# Altium PCB B2.0-主板-2.0-stm32c8t6最小系统板-24.10.16.PcbDoc
Units mm, origin at the board's own origin, x right, y up, seen from the top; angles counter-clockwise.
Board outline 152.4 x 101.6 mm, 2 copper layers (Top Layer, Bottom Layer); 14 components, 38 nets, 118 pads, 2 vias.
Unrouted connection lines stored in the file: 5.
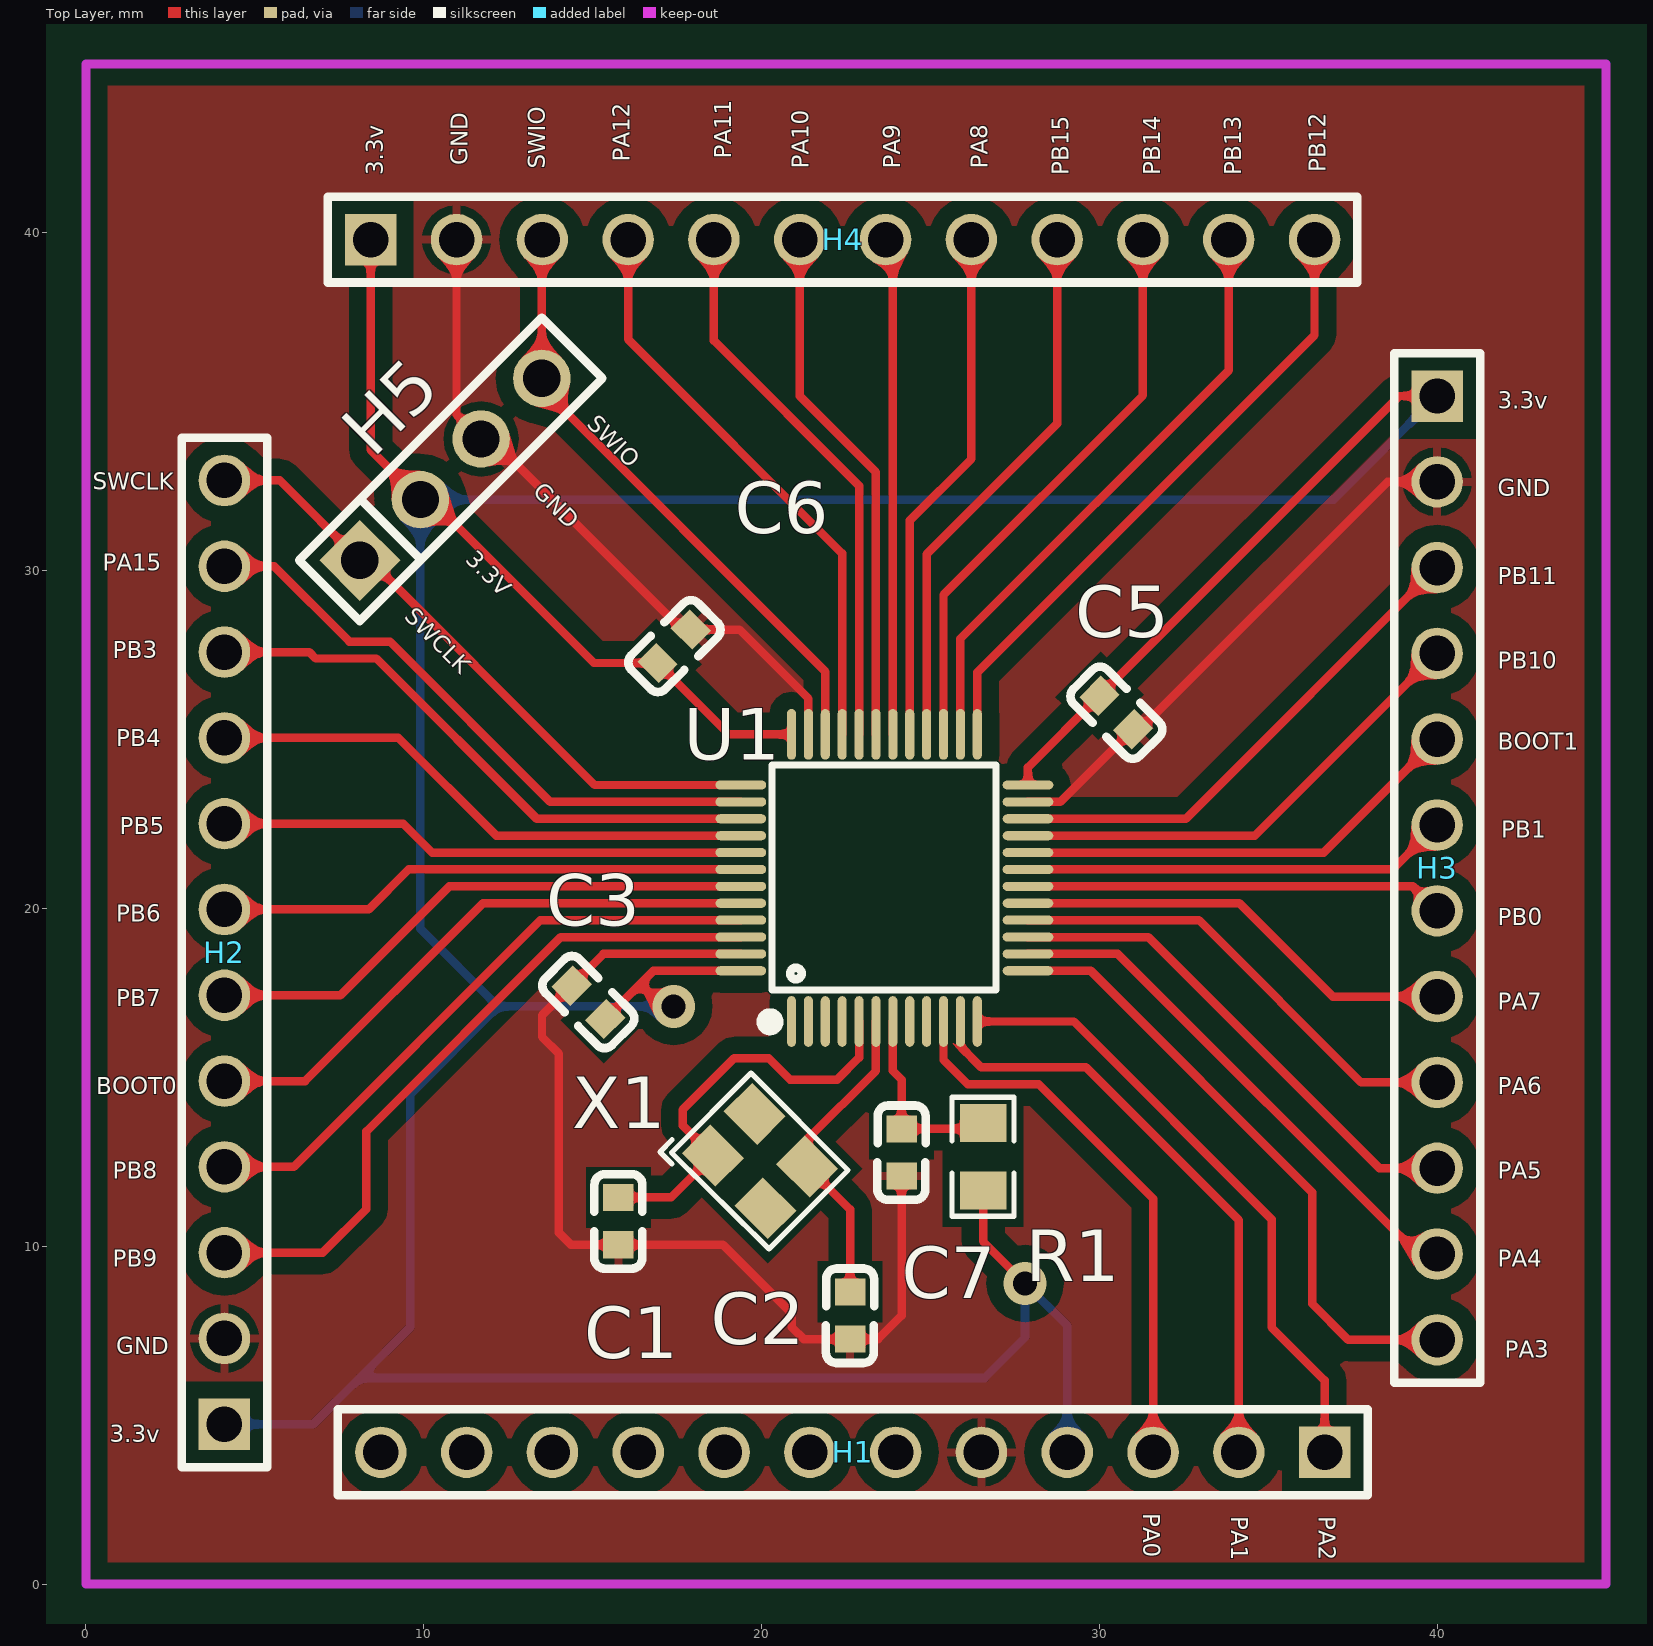
[diagram p0: Top Layer view]
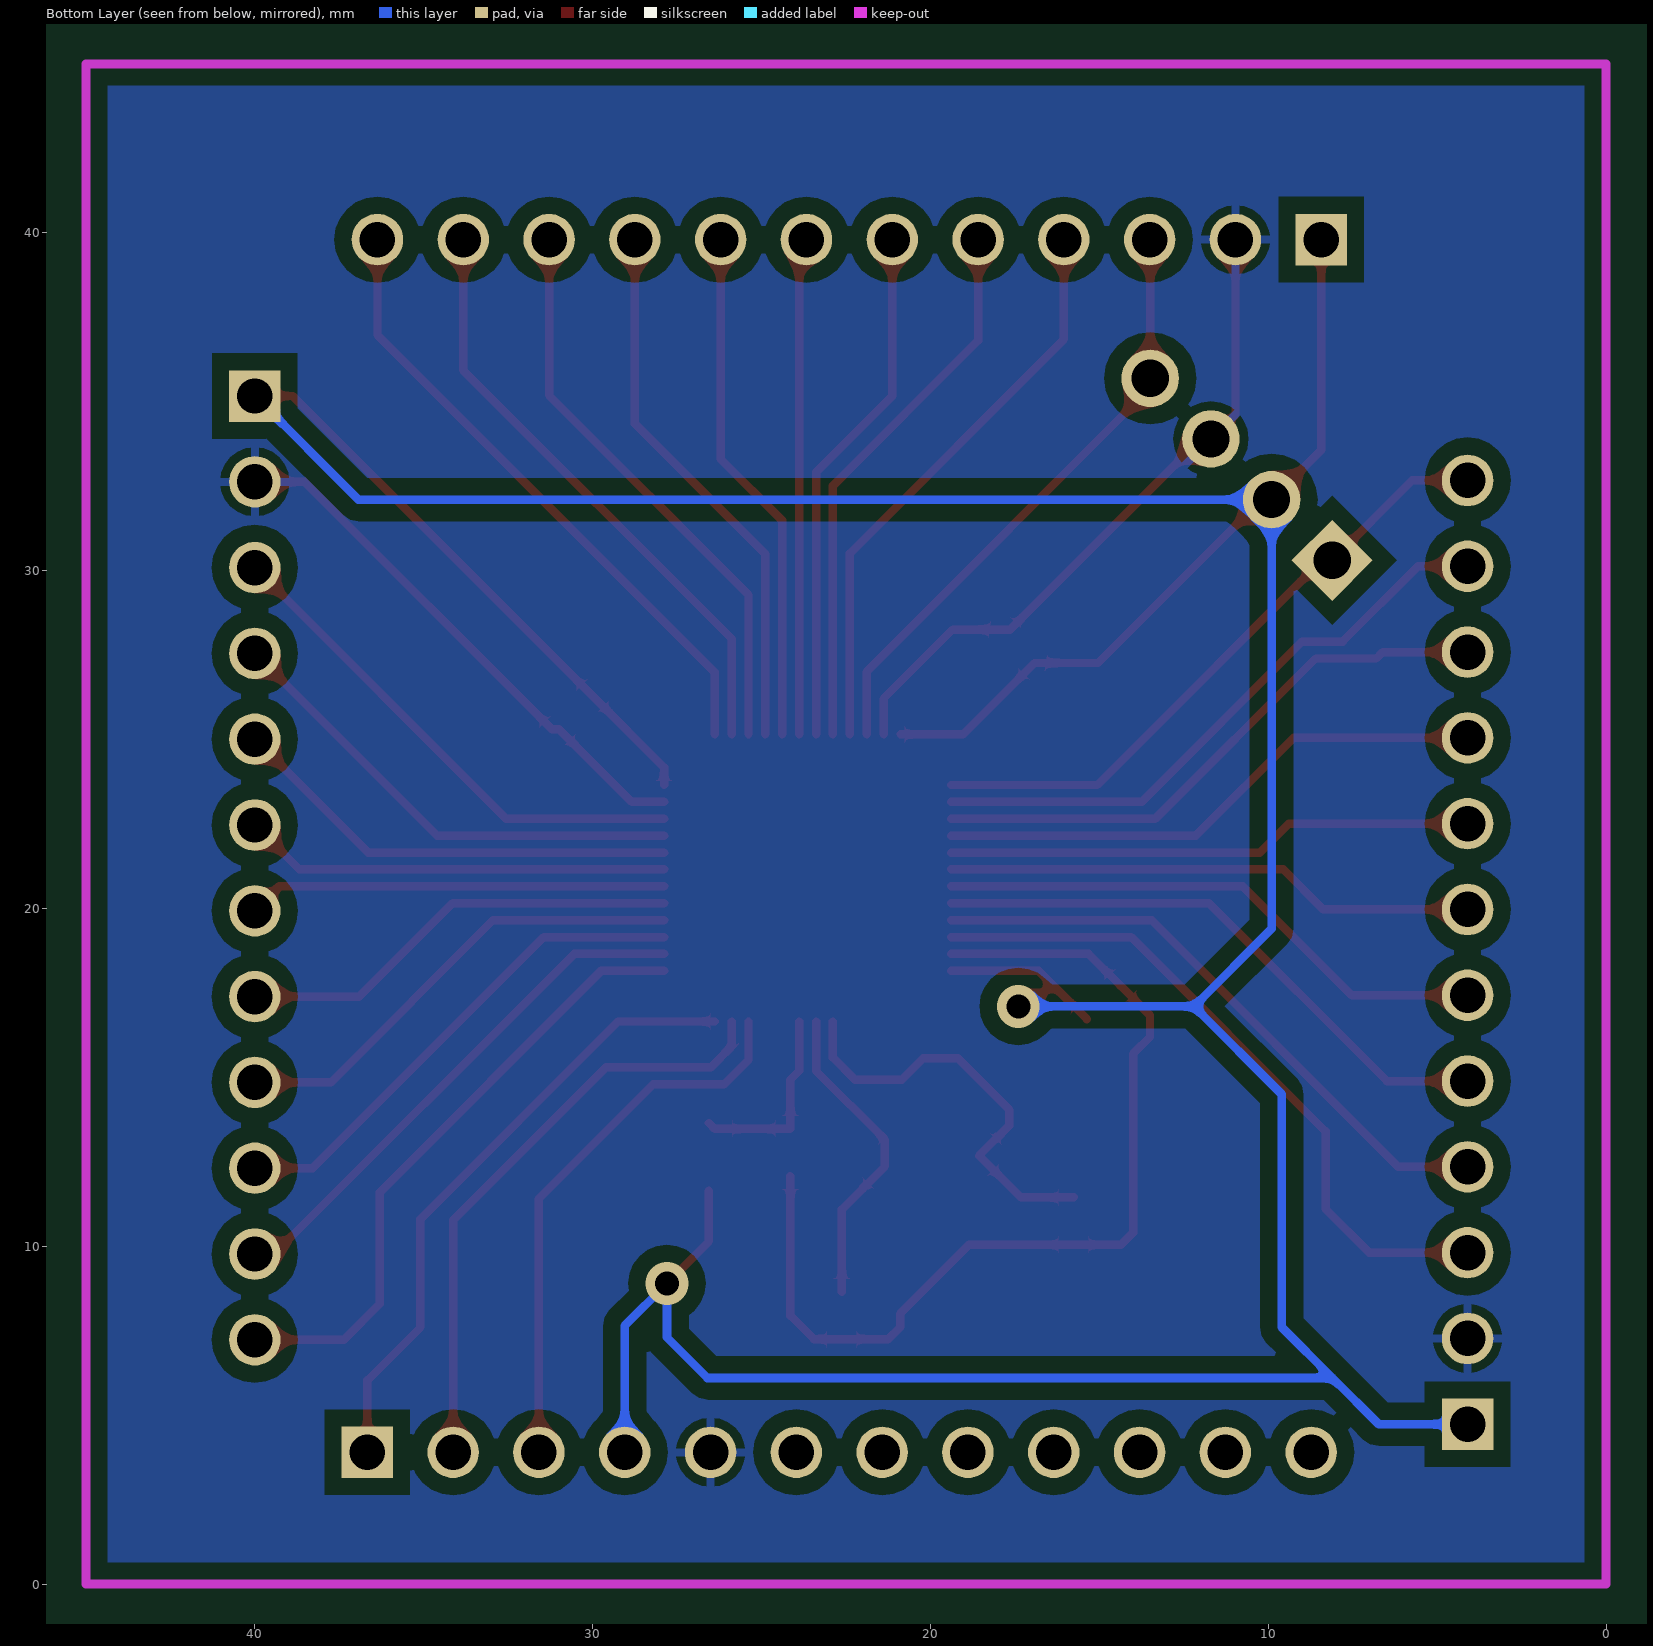
[diagram p1: Bottom Layer view, seen from below]

## Layer stack, top to bottom
Top Solder: solder mask 0.0102, Solder Resist, Dk 3.5
Top Layer: signal copper 0.0356
Dielectric 1: dielectric 0.32, FR-4, Dk 4.8
Bottom Layer: signal copper 0.0356
Bottom Solder: solder mask 0.0102, Solder Resist, Dk 3.5

## Board outline
-43.4,-37.6 109,-37.6 109,64 -43.4,64

## Design rules (kind name [scope] priority, off if disabled: settings)
Clearance Clearance_6 [InNamedPolygon('GND_L02_P002')] p1: gap=0.5
Clearance Clearance_5 [InNamedPolygon('GND_L02_P002')] p2: gap=0.5
Clearance Clearance_4 [InNamedPolygon('GND_L02_P002')] p3: gap=0.5
Clearance Clearance_3 [InNamedPolygon('Top Layer-GND')] p4: gap=0.5
Clearance Clearance_2 [InNamedPolygon('Top Layer-GND')] p5: gap=0.254
Clearance Clearance_1 [InNamedPolygon('Top Layer-GND')] p6: gap=0.5
Clearance [All] p7: gap=0.1
PolygonConnect [All] p1: connectstyle=Relief reliefconductorwidth=0.254 reliefentries=4 polygonreliefangle="90 Angle" airgapwidth=0.254
RoutingVias [All] p1: holewidth=0.711 width=1.27 viastyle="Through Hole" minholewidth=0.711 minwidth=1.27 maxholewidth=0.711 maxwidth=1.27
SolderMaskExpansion [All] p1: expansion=0.102
Width [All] p1: maxlimit=0.254 minlimit=0.25 preferedwidth=0.254 toplayer_maxwidth=0.25 toplayer_prefwidth=0.25 bottomlayer_minwidth=0.254 minimp=50.000000 maximp=50.000000 favimp=50.000000
30 further rules are at their usual default settings.

## Components (designator, comment, footprint, x,y, rotation, side; value= is the part's Value field where it differs from the comment)
C1 "12pF" C0603 15.763,10.744 r90 top
C2 "12pF" C0603 22.621,7.95 r90 top
C3 "100nF" C0603 14.874,17.221 r315 top
C5 "100nF" C0603 30.5,25.8 r135 top
C6 "100nF" C0603 17.414,27.762 r225 top
C7 "1uF" C0603 24.145,12.776 r90 top
H1 "PZ254V-11-12P" HDR-TH_12P-P2.54-V-M 22.7,3.9 r180 top
H2 "PZ254V-11-12P" HDR-TH_12P-P2.54-V-M 4.1,18.7 r90 top
H3 "PZ254V-11-12P" HDR-TH_12P-P2.54-V-M 40,21.2 r270 top
H4 "PZ254V-11-12P" HDR-TH_12P-P2.54-V-M 22.4,39.8 r0 top
H5 "PZ254V-11-04P" HDR-TH_4P-P2.54-V-M 10.8,33 r45 top
R1 "10kΩ" R0805 26.558,12.649 r270 top
U1 "STM32F103C8T6" LQFP-48_L7.0-W7.0-P0.50-LS9.0-BL 23.637,20.904 r0 top
X1 "8MHz" OSC-SMD_4P-L3.2-W2.5-BL 19.954,12.522 r315 top

## Footprints (in the part's own frame and the unit in brackets; to place one, negate y for a bottom-side part, rotate by r counter-clockwise, add the part's x,y. Pads: shape width x height; smd on the part's side, far side on the other; paste and mask are expansions set on the pad)
C0603 [mm]
  rect 0.8x0.9 smd: 1(-0.7,0) 2(0.7,0)
  silkscreen extent -1.41,-0.71 1.39,0.72
HDR-TH_4P-P2.54-V-M [mm]
  rect 1.7x1.7 hole 1.1: 1(-3.81,0)
  round 1.7 hole 1.1: 2(-1.27,0) 3(1.27,0) 4(3.81,0)
  silkscreen extent -5.08,-1.27 5.08,1.27
HDR-TH_12P-P2.54-V-M [mil]
  rect 60x60 hole 41.34: 1(-550,0)
  round 60 hole 41.34: 2(-450,0) 3(-350,0) 4(-250,0) 5(-150,0) 6(-50,0) 7(50,0) 8(150,0) 9(250,0) 10(350,0) 11(450,0) 12(550,0)
  silkscreen extent -600,-50 600,50
LQFP-48_L7.0-W7.0-P0.50-LS9.0-BL [mm]
  oval 0.27x1.5 smd paste+0 mask+0.05: 1(-2.75,-4.25) 2(-2.25,-4.25) 3(-1.75,-4.25) 4(-1.25,-4.25) 5(-0.75,-4.25) 6(-0.25,-4.25) 7(0.25,-4.25) 8(0.75,-4.25) 9(1.25,-4.25) 10(1.75,-4.25) 11(2.25,-4.25) 12(2.75,-4.25) 25(2.75,4.25) 26(2.25,4.25) 27(1.75,4.25) 28(1.25,4.25) 29(0.75,4.25) 30(0.25,4.25) 31(-0.25,4.25) 32(-0.75,4.25) 33(-1.25,4.25) 34(-1.75,4.25) 35(-2.25,4.25) 36(-2.75,4.25)
  oval 1.5x0.27 smd paste+0 mask+0.05: 13(4.25,-2.75) 14(4.25,-2.25) 15(4.25,-1.75) 16(4.25,-1.25) 17(4.25,-0.75) 18(4.25,-0.25) 19(4.25,0.25) 20(4.25,0.75) 21(4.25,1.25) 22(4.25,1.75) 23(4.25,2.25) 24(4.25,2.75) 37(-4.25,2.75) 38(-4.25,2.25) 39(-4.25,1.75) 40(-4.25,1.25) 41(-4.25,0.75) 42(-4.25,0.25) 43(-4.25,-0.25) 44(-4.25,-0.75) 45(-4.25,-1.25) 46(-4.25,-1.75) 47(-4.25,-2.25) 48(-4.25,-2.75)
  silkscreen extent -3.59,-4.46 3.3,3.34
OSC-SMD_4P-L3.2-W2.5-BL [mm]
  rect 1.4x1.2 smd: 1(-1.1,-0.875) 2(1.1,-0.875) 3(1.1,0.875) 4(-1.1,0.875)
  silkscreen extent -2.29,-1.9 2.03,1.65
R0805 [mm]
  rect 1.133x1.377 smd paste-100 mask+0.051: 1(-1,0) 2(1,0)
  silkscreen extent -1.76,-0.92 1.76,0.92

## Part data
C1 C2: library part CC0603FRNPO9BN120
C3 C5 C6: library part 0603B104K500NT
C7: library part CC0603KRX7R9BB105
R1: library part 0805W8J0103T5E
X1: library part X32258MOB4SI

## Via types
v1: diameter 1.27, hole 0.711, Top Layer to Bottom Layer, 2 vias

## Nets (pads, with @x,y where several pads share a name; then routed paths per layer and width w, separated by ;. In a path a pad name is that pad's centre, name@x,y a point inside that pad or via, vN(x,y) a via of type N, cw(c..) or ccw(c..) an arc to the next point about the centre after c; other vN are vias at no path point)
3.3V: C3.2 C5.2 C6.2 H1.4 H2.1 H3.1 H4.1 H5.2 R1.2 U1.9 U1.24 U1.36 U1.48 | length 145.9
  Top Layer w0.25: H4.1 8.43,33.574 H5.2 ; H5.2@9.802,32.502 15.037,27.267 C6.2 19.032,25.154 U1.36 ; C3.2 16.4,17.757 ; v1(17.4,17.1) 17.057,17.1 16.4,17.757 ; U1.48 16.797,18.154 16.4,17.757 ; R1.2 26.558,10.142 v1(27.8,8.9) ; U1.24 27.887,24.177 C5.2 38.88,35.17 H3.1
  Bottom Layer w0.254: H2.1 6.73,4.73 8.1,6.1 ; v1(17.4,17.1) 12.2,17.1 ; H1.4 29.05,7.65 v1(27.8,8.9) 27.8,7.3 26.6,6.1 8.1,6.1 ; H3.1 36.932,32.102 H5.2 9.902,19.398 12.2,17.1 ; 8.1,6.1 9.6,7.6 9.6,14.5 12.2,17.1
GND: C1.1 C2.1 C3.1 C5.1 C6.1 C7.1 H1.5 H2.2 H3.2 H4.2 H5.3 U1.8 U1.23 U1.35 U1.47 | length 65.8
  Top Layer w0.25: H4.2 10.97,34.626 H5.3 ; H5.3@11.598,34.298 17.639,28.257 C6.1 19.343,28.257 21.387,26.213 U1.35 ; U1.47 15.317,18.654 C3.1 13.5,16.837 13.5,16.2 14,15.7 14,10.4 14.356,10.044 C1.1 18.856,10.044 20.9,8 20.9,7.6 21.25,7.25 C2.1 23.45,7.25 24.145,7.945 C7.1 ; U1.23 28.844,23.154 C5.1 31.205,25.305 38.53,32.63 H3.2
NetH1_1: H1.1 U1.12 | length 18.7
  Top Layer w0.25: U1.12 29.246,16.654 35.1,10.8 35.1,7.6 36.67,6.03 H1.1
NetH1_2: H1.2 U1.11 | length 18
  Top Layer w0.25: U1.11 25.887,15.913 26.5,15.3 29.6,15.3 34.13,10.77 H1.2
NetH1_3: H1.3 U1.10 | length 16.6
  Top Layer w0.25: U1.10 25.387,15.513 26.1,14.8 28.2,14.8 31.59,11.41 H1.3
NetH2_3: H2.3 U1.46 | length 20.5
  Top Layer w0.25: H2.3 7.01,9.81 8.3,11.1 8.3,13.4 14.054,19.154 U1.46
NetH2_4: H2.4 U1.45 | length 18.3
  Top Layer w0.25: H2.4 6.15,12.35 13.454,19.654 U1.45
NetH2_5: H2.5 U1.44 | length 17.5
  Top Layer w0.25: H2.5 6.49,14.89 11.754,20.154 U1.44
NetH2_6: H2.6 U1.43 | length 16.6
  Top Layer w0.25: H2.6 7.53,17.43 10.754,20.654 U1.43
NetH2_7: H2.7 U1.42 | length 15.8
  Top Layer w0.25: H2.7 8.37,19.97 9.554,21.154 U1.42
NetH2_8: H2.8 U1.41 | length 15.6
  Top Layer w0.25: H2.8 9.39,22.51 10.246,21.654 U1.41
NetH2_9: H2.9 U1.40 | length 16.5
  Top Layer w0.25: H2.9 9.25,25.05 12.146,22.154 U1.40
NetH2_10: H2.10 U1.39 | length 17.3
  Top Layer w0.25: H2.10 6.61,27.59 6.8,27.4 8.6,27.4 13.346,22.654 U1.39
NetH2_11: H2.11 U1.38 | length 18.2
  Top Layer w0.25: H2.11 5.57,30.13 7.8,27.9 9,27.9 13.746,23.154 U1.38
NetH3_3: H3.3 U1.22 | length 15.2
  Top Layer w0.25: U1.22 32.564,22.654 H3.3
NetH3_4: H3.4 U1.21 | length 14.3
  Top Layer w0.25: U1.21 34.604,22.154 H3.4
NetH3_5: H3.5 U1.20 | length 13.5
  Top Layer w0.25: U1.20 36.644,21.654 H3.5
NetH3_6: H3.6 U1.19 | length 12.7
  Top Layer w0.25: U1.19 38.684,21.154 H3.6
NetH3_7: H3.7 U1.18 | length 12.4
  Top Layer w0.25: U1.18 39.276,20.654 H3.7
NetH3_8: H3.8 U1.17 | length 13.3
  Top Layer w0.25: U1.17 34.146,20.154 36.91,17.39 H3.8
NetH3_9: H3.9 U1.16 | length 14.1
  Top Layer w0.25: U1.16 32.946,19.654 37.75,14.85 H3.9
NetH3_10: H3.10 U1.15 | length 14.9
  Top Layer w0.25: U1.15 31.446,19.154 38.29,12.31 H3.10
NetH3_11: H3.11 U1.14 | length 15.8
  Top Layer w0.25: U1.14 30.546,18.654 39.43,9.77 H3.11
NetH3_12: H3.12 U1.13 | length 18.6
  Top Layer w0.25: U1.13 29.746,18.154 36.3,11.6 36.3,8.3 37.37,7.23 H3.12
NetH4_4: H4.4 U1.33 | length 17.3
  Top Layer w0.25: H4.4 16.05,36.85 22.387,30.513 U1.33
NetH4_5: H4.5 U1.32 | length 16.4
  Top Layer w0.25: H4.5 18.59,36.81 22.887,32.513 U1.32
NetH4_6: H4.6 U1.31 | length 15.6
  Top Layer w0.25: H4.6 21.13,35.17 23.387,32.913 U1.31
NetH4_7: H4.7 U1.30 | length 14.7
  Top Layer w0.25: H4.7 23.887,39.583 U1.30
NetH4_8: H4.8 U1.29 | length 15.4
  Top Layer w0.25: U1.29 24.387,31.487 26.21,33.31 H4.8
NetH4_9: H4.9 U1.28 | length 16.2
  Top Layer w0.25: U1.28 24.887,30.487 28.75,34.35 H4.9
NetH4_10: H4.10 U1.27 | length 17.1
  Top Layer w0.25: U1.27 25.387,29.287 31.29,35.19 H4.10
NetH4_11: H4.11 U1.26 | length 17.9
  Top Layer w0.25: U1.26 25.887,27.987 33.83,35.93 H4.11
NetH4_12: H4.12 U1.25 | length 18.8
  Top Layer w0.25: U1.25 26.387,26.987 36.37,36.97 H4.12
OSC_IN: C1.2 H1.8 U1.5 X1.1 | length 12.5
  Top Layer w0.25: C1.2 17.32,11.444 X1.1 17.668,13.571 17.668,14.046 19.192,15.57 20.208,15.57 20.843,14.935 22.24,14.935 22.887,15.582 U1.5
OSC_OUT: C2.2 H1.7 U1.6 X1.3 | length 9.4
  Top Layer w0.25: C2.2 22.621,11.092 X1.3 21.351,13.157 23.387,15.193 U1.6
RESET: C7.2 H1.6 R1.1 U1.7 | length 5.8
  Top Layer w0.25: U1.7 23.887,15.193 24.145,14.935 C7.2 26.385,13.476 R1.1
SWCLK: H2.12 H5.1 U1.37 | length 19.3
  Top Layer w0.25: H2.12 5.742,32.67 H5.1 ; H5.1@8.006,30.706 15.058,23.654 U1.37
SWIO: H4.3 H5.4 U1.34 | length 18.6
  Top Layer w0.25: H5.4@13.394,36.094 13.394,35.506 21.887,27.013 U1.34 ; H5.4 13.494,39.784 H4.3
pads on no net: H1.9 H1.10 H1.11 H1.12 U1.1 U1.2 U1.3 U1.4 X1.2 X1.4

## Polygon pours and split planes (outlines as drawn)
GND on Top Layer "Top Layer-GND" (solid, remove dead copper, pour order 0): 0,45 0,0 45,0 45,45 0,45
GND on Bottom Layer "GND_L02_P002" (solid, remove dead copper, pour order 2): 0,45 0,0 45,0 45,45 0,45

## Keep-outs
Keep-Out Layer:
  lines w0.254: 0,0 45,0 45,45 0,45 0,0

## Silkscreen, mask and mechanical layers (free items; w line width, h text height)
Top Overlay:
  text "PA11" at 19.1,42.2 h0.5 r90
  text "PA12" at 16.1,42.1 h0.5 r90
  text "GND" at 11.3,42 h0.5 r90
  text "SWIO" at 13.6,41.9 h0.5 r90
  text "PA10" at 21.4,41.9 h0.5 r90
  text "PA9" at 24.1,41.9 h0.5 r90
  text "PA8" at 26.7,41.9 h0.5 r90
  text "PB12" at 36.7,41.8 h0.5 r90
  text "3.3v" at 8.8,41.7 h0.5 r90
  text "PB15" at 29.1,41.7 h0.5 r90
  text "PB14" at 31.8,41.7 h0.5 r90
  text "PB13" at 34.2,41.7 h0.5 r90
  text "3.3v" at 41.8,34.8 h0.5
  text "SWIO" at 14.8,34.3 h0.5 r315
  text "SWCLK" at 0.2,32.4 h0.5
  text "GND" at 13.2,32.3 h0.5 r315
  text "GND" at 41.8,32.2 h0.5
  text "3.3V" at 11.2,30.3 h0.5 r315
  text "PA15" at 0.5,30 h0.5
  text "PB11" at 41.8,29.6 h0.5
  text "SWCLK" at 9.4,28.6 h0.5 r315
  text "PB3" at 0.8,27.4 h0.5
  text "PB10" at 41.8,27.1 h0.5
  text "PB4" at 0.9,24.8 h0.5
  text "BOOT1" at 41.8,24.7 h0.5
  text "PB5" at 1,22.2 h0.5
  text "PB1" at 41.9,22.1 h0.5
  text "PB6" at 0.9,19.6 h0.5
  text "PB0" at 41.8,19.5 h0.5
  text "PB7" at 0.9,17.1 h0.5
  text "PA7" at 41.8,17 h0.5
  text "BOOT0" at 0.3,14.5 h0.5
  text "PA6" at 41.8,14.5 h0.5
  text "PB8" at 0.8,12 h0.5
  text "PA5" at 41.8,12 h0.5
  text "PB9" at 0.8,9.4 h0.5
  text "PA4" at 41.8,9.4 h0.5
  text "GND" at 0.9,6.8 h0.5
  text "PA3" at 42,6.7 h0.5
  text "3.3v" at 0.7,4.2 h0.5
  text "PA0" at 31.3,2.1 h0.5 r270
  text "PA1" at 33.9,2 h0.5 r270
  text "PA2" at 36.5,2 h0.5 r270